# Altium PCB STRWL-P01-V01.PcbDoc
Units mil, origin at the board's own origin, x right, y up, seen from the top; angles counter-clockwise.
Board outline 2615 x 3075 mil, 2 copper layers (Top Layer, Bottom Layer); 102 components, 62 nets, 400 pads, 108 vias.
Unrouted connection lines stored in the file: 27.
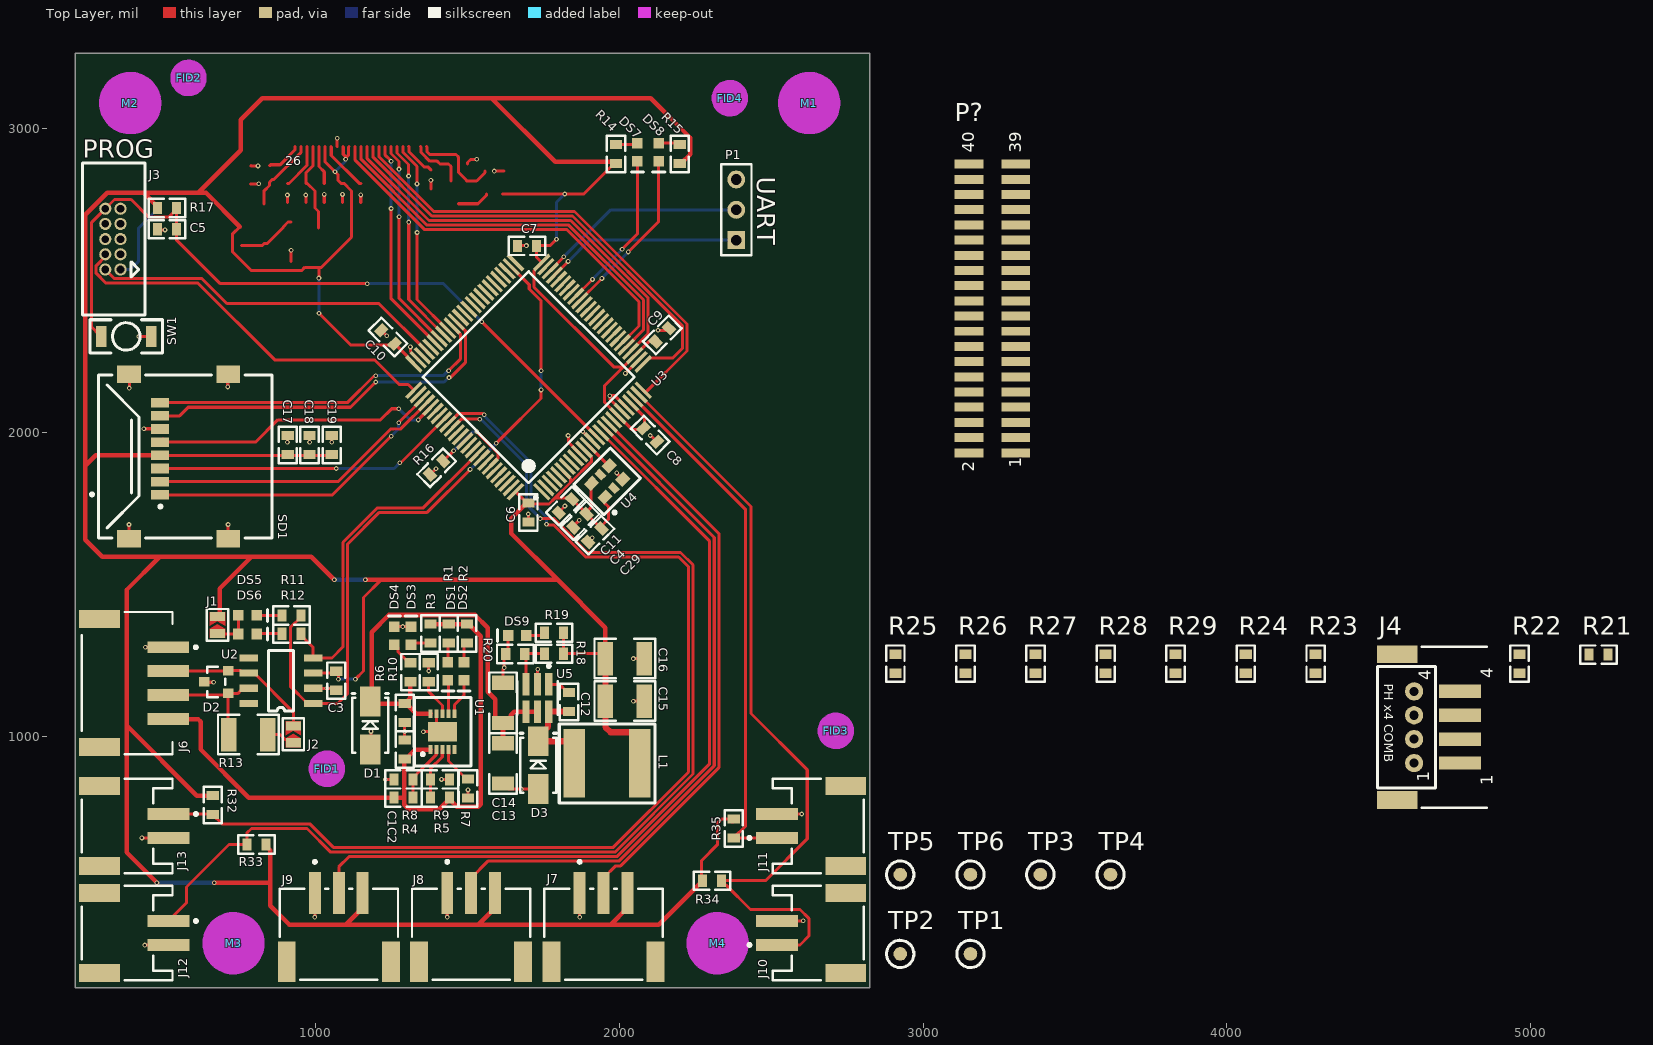
[diagram p0: Top Layer view]
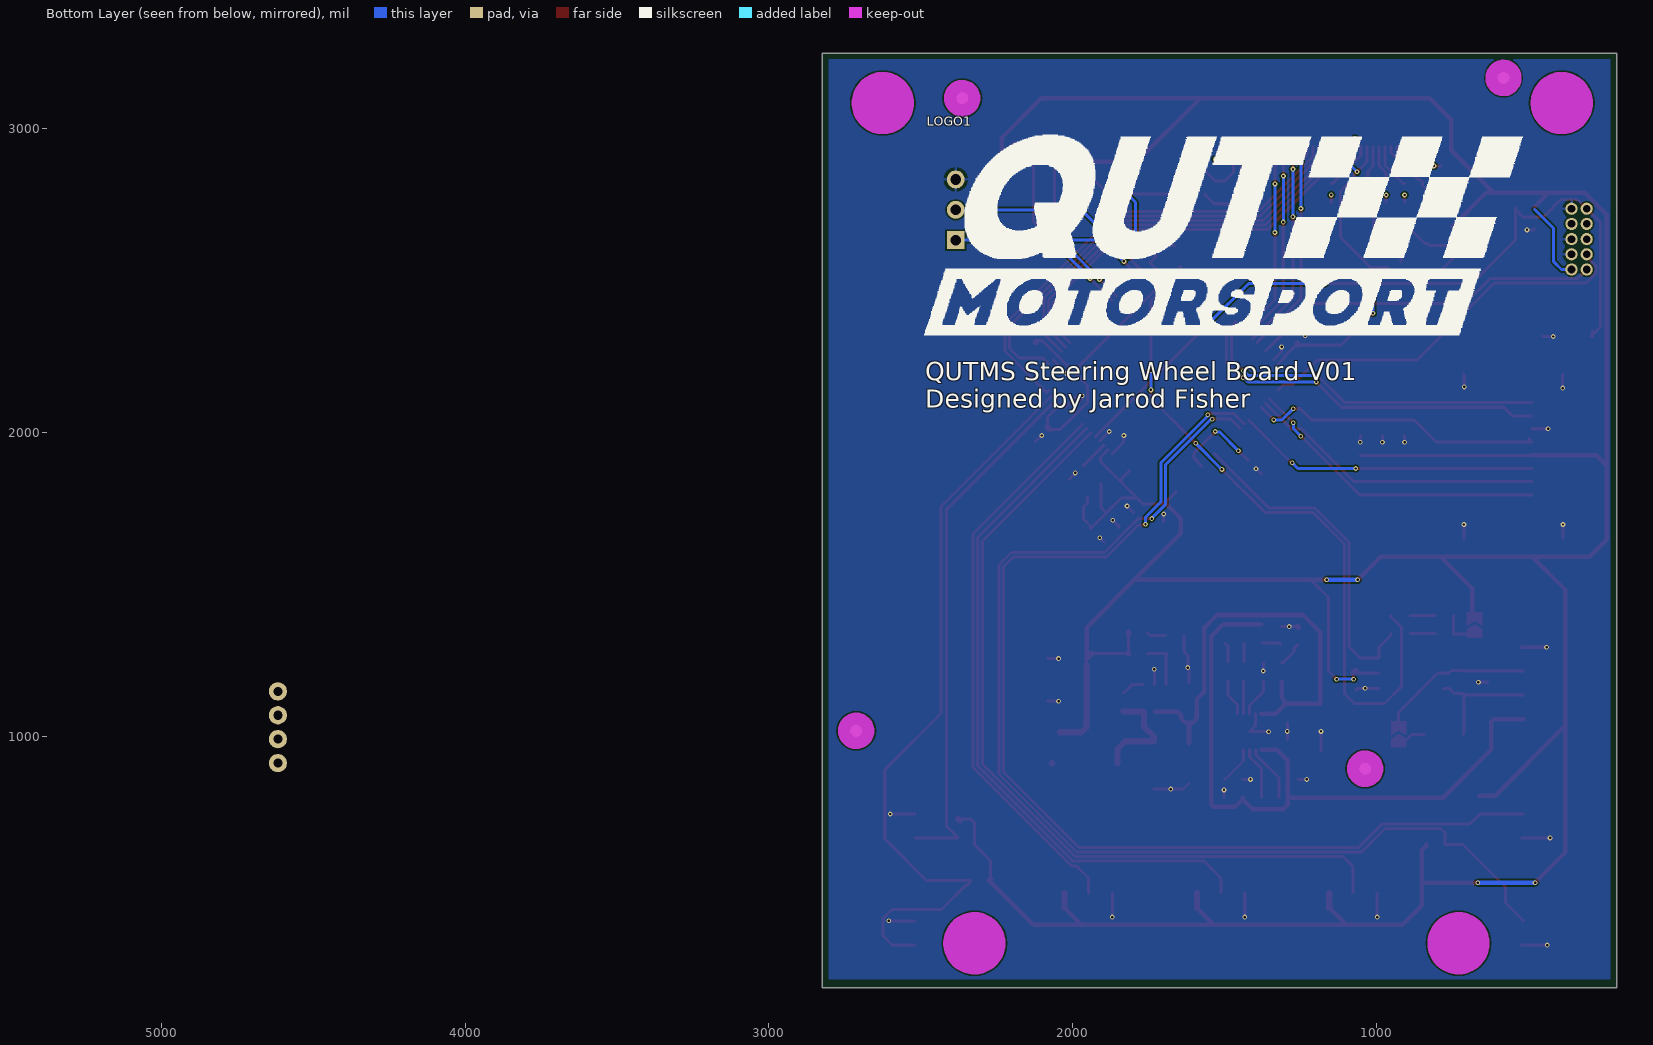
[diagram p1: Bottom Layer view, seen from below]

## Layer stack, top to bottom
Top Solder: solder mask 0.4, Solder Resist, Dk 3.5
Top Layer: signal copper 1.4
Dielectric 1: dielectric 12.6, FR-4, Dk 4.8
Bottom Layer: signal copper 1.4
Bottom Solder: solder mask 0.4, Solder Resist, Dk 3.5

## Board outline
210,173 2825,173 2825,3248 210,3248

## Design rules (kind name [scope] priority, off if disabled: settings)
Clearance [All] p1: gap=5 ignorepadtopadclearanceinfootprint=TRUE
PolygonConnect [All] p1: thpad.connectstyle=Relief thpad.reliefconductorwidth=10 thpad.reliefentries=4 thpad.polygonreliefangle="90 Angle" thpad.airgapwidth=10 smdpad.connectstyle=Relief smdpad.reliefconductorwidth=10 smdpad.reliefentries=4 smdpad.polygonreliefangle="90 Angle" smdpad.airgapwidth=10 via.connectstyle=Direct via.reliefconductorwidth=10 via.reliefentries=4 via.polygonreliefangle="90 Angle" via.airgapwidth=10
RoomDefinition U_STRWL-S06-V00-Peripherals [InComponentClass('U_STRWL-S06-V00-Peripherals')] p1: confinementstyle=ConfineIn formatcopy=TRUE lockcomponents=FALSE outline 2870,751 5325,751 5325,1409 2870,1409
RoomDefinition U_STRWL-S05-V00-Master-PSU3V3-300mA [InComponentClass('U_STRWL-S05-V00-Master-PSU3V3-300mA')] p2: confinementstyle=ConfineIn formatcopy=TRUE lockcomponents=FALSE outline 0,0 2000,0 2000,1000 0,1000
RoomDefinition U_STRWL-S04-V00-Microcontroller [InComponentClass('U_STRWL-S04-V00-Microcontroller')] p3: confinementstyle=ConfineIn formatcopy=TRUE lockcomponents=FALSE outline 0,0 2000,0 2000,1000 0,1000
RoomDefinition U_STRWL-S03-V00-CAN_MAIN [InComponentClass('U_STRWL-S03-V00-CAN_MAIN')] p4: confinementstyle=ConfineIn formatcopy=TRUE lockcomponents=FALSE outline 2870,490 3753,490 3753,701 2870,701
RoomDefinition U_STRWL-S02-V00-12VProtection [InComponentClass('U_STRWL-S02-V00-12VProtection')] p5: confinementstyle=ConfineIn formatcopy=TRUE lockcomponents=FALSE outline 2870,229 3272,229 3272,440 2870,440
RoomDefinition STRWL-S01-V01-Master1 [InComponentClass('STRWL-S01-V01-Master1')] p6: confinementstyle=ConfineIn formatcopy=TRUE lockcomponents=FALSE outline 0,0 2000,0 2000,1000 0,1000
RoutingVias [All] p1: holewidth=7.87 width=15.75 viastyle="Through Hole" minholewidth=7.87 minwidth=15.75 maxholewidth=7.87 maxwidth=15.75
SilkToSilkClearance [All] p1: silktosilkclearance=1
SolderMaskExpansion SolderMaskExpansion_Via [IsVia] p1: expansion=4 istentingtop=TRUE
SolderMaskExpansion [All] p2: expansion=4 istentingtop=FALSE
Width [All] p1: maxlimit=20 minlimit=5 preferedwidth=10
29 further rules are at their usual default settings.

## Classes and differential pairs
component class U_STRWL-S06-V00-Peripherals: C17 C18 C19 J4 R21 R22 R23 R24 R25 R26 R27 R28 R29 SD1
component class U_STRWL-S05-V00-Master-PSU3V3-300mA: C12 C13 C14 C15 C16 D3 DS9 L1 R18 R19 R20 U5
component class U_STRWL-S04-V00-Microcontroller: C4 C5 C6 C7 C8 C9 C10 C11 C29 DS7 DS8 J3 P1 R14 R15 R16 R17 SW1 U3 U4
component class U_STRWL-S03-V00-CAN_MAIN: C3 D2 DS5 DS6 J1 J2 R11 R12 R13 TP3 TP4 TP5 TP6 U2
component class U_STRWL-S02-V00-12VProtection: 2 C1 C2 D1 DS1 DS2 DS3 DS4 R1 R2 R3 R4 R5 R6 R7 R8 R9 R10 TP1 TP2 U1
component class STRWL-S01-V01-Master1: FID1 FID2 FID3 FID4 J6 J7 J8 J9 J10 J11 J12 J13 LOGO1 M1 M2 M3 M4 P? R32 R33 R34 R35

## Components (designator, comment, footprint, x,y, rotation, side; value= is the part's Value field where it differs from the comment)
C1 "4u7 50V 5%" Cap_Ceramic_0603 1294.24,1076.23 r90 top
C2 "470nF 50V 5%" Cap_Ceramic_0603 1294.24,956.23 r270 top
C3 "100nF 50V 5% X7R 0603" Cap_Ceramic_0603 1069,1183 r270 top
C4 "100nF 50V 5% X7R 0603" Cap_Ceramic_0603 1871,1709.74 r45 top
C5 "100nF 50V 5% X7R 0603" Cap_Ceramic_0603 511.61,2668.74 r0 top
C6 "100nF 50V 5% X7R 0603" Cap_Ceramic_0603 1701.3,1736.97 r90 top
C7 "100nF 50V 5% X7R 0603" Cap_Ceramic_0603 1697,2614 r0 top
C8 "100nF 50V 5% X7R 0603" Cap_Ceramic_0603 2102.38,1991.49 r135 top
C9 "100nF 50V 5% X7R 0603" Cap_Ceramic_0603 2142,2321 r225 top
C10 "100nF 50V 5% X7R 0603" Cap_Ceramic_0603 1239,2314 r315 top
C11 "4u7" Cap_Ceramic_0603 1823.08,1757.98 r45 top
C12 "100nF 50V 5% X7R 0603" Cap_Ceramic_0603 1834.83,1112.69 r270 top
C13 "22uF 35V" Cap_Ceramic_1206 1617.83,910.69 r270 top
C14 "22uF 35V" Cap_Ceramic_1206 1617.83,1110.16 r90 top
C15 "47uF 16V 1210" Cap_Ceramic_1210 2018.83,1115.69 r180 top
C16 "47uF 16V 1210" Cap_Ceramic_1210 2018.83,1255.69 r180 top
C17 "4u7" Cap_Ceramic_0603 909.44,1958.82 r270 top
C18 "1uF" Cap_Ceramic_0603 981.2,1958.82 r270 top
C19 "100nF 50V 5% X7R 0603" Cap_Ceramic_0603 1054.07,1958.82 r270 top
C29 "100nF 50V 5% X7R 0603" Cap_Ceramic_0603 1920.03,1661.92 r45 top
D1 "1N4448WQ-7-F" SMA 1181.24,1036 r90 top
D2 "NUP2105L" NUP2105L 674,1179 r90 top
D3 "B260A-13-F" SMA 1733.83,905.16 r90 top
DS1 "LED Red 0603" "LED RED 0603" 1436.3,1214 r270 top
DS2 "LED Red 0603" "LED RED 0603" 1489.24,1214 r270 top
DS3 "LED Green 0603" "LED GREEN 0603" 1315.24,1331 r90 top
DS4 "LED Green 0603" "LED GREEN 0603" 1260.24,1331 r90 top
DS5 "LED Blue 0603" "LED BLUE 0603" 777.12,1397.86 r0 top
DS6 "LED Blue 0603" "LED BLUE 0603" 777.12,1336.62 r0 top
DS7 "LED Orange" "LED ORANGE 0603" 2060.15,2922.03 r270 top
DS8 "LED Orange" "LED ORANGE 0603" 2130.2,2922.03 r270 top
DS9 "LED Green 0603" "LED GREEN 0603" 1664.59,1331.92 r180 top
FID1 "Fiducial 1MM" "FIDUCIAL 1MM" 1038.18,893.24 r0 top
FID2 "Fiducial 1MM" "FIDUCIAL 1MM" 582.87,3166.62 r90 top
FID3 "Fiducial 1MM" "FIDUCIAL 1MM" 2713,1018 r90 top
FID4 "Fiducial 1MM" "FIDUCIAL 1MM" 2364,3100 r90 top
J1 "Jumper 2Way Solderable" Jumper_2Way_Solderable 678,1339 r0 top
J2 "Jumper 2Way Solderable" Jumper_2Way_Solderable 928,979 r0 top
J3 "IDC 10P 2x5 1.27mm" "IDC 1.27MM 10P" 334,2636.24 r90 top
J4 "JST PH 4x RIGHT COMB" "JST PH 4x RIGHT COMB" 4501,1030 r90 top
J6 "JST PH 4 Way SMD Header" "JST 4P SMD" 380.52,1175.04 r90 top
J7 "JST PH 3 Way SMD Header" "JST 3P SMD" 1948.73,348.98 r0 top
J8 "JST PH 3 Way SMD Header" "JST 3P SMD" 1513.06,348.98 r0 top
J9 "JST PH 3 Way SMD Header" "JST 3P SMD" 1077.39,348.98 r0 top
J10 "JST PH 2 Way SMD Header" "JST 2P SMD" 2655,352.98 r90 top
J11 "JST PH 2 Way SMD Header" "JST 2P SMD" 2655,705 r90 top
J12 "JST PH 2 Way SMD Header" "JST 2P SMD" 380.58,352.98 r270 top
J13 "JST PH 2 Way SMD Header" "JST 2P SMD" 380.58,705 r270 top
L1 "74404064221" Inductor_6x6mm 1957.83,911.16 r0 top
LOGO1 "50mm Wide QUTMS Logo" "QUTMS LOGO 50MM" 2490,2320 r180 bottom
M1 "Hole M3 Tight Unplated" "M3.2 UNPLATED" 2625.36,3083.86 r0 top
M2 "Hole M3 Tight Unplated" "M3.2 UNPLATED" 391.2,3083.86 r0 top
M3 "Hole M3 Tight Unplated" "M3.2 UNPLATED" 731,319 r0 top
M4 "Hole M3 Tight Unplated" "M3.2 UNPLATED" 2324,319 r0 top
P1 "Header 3" HDR1X3 2385.36,2632.57 r90 top
P? "62104021021" 62104021021 3228,2408 r90 top
R1 "4k7 5% 0603" Res_ThinFilm_0603 1439.38,1337.99 r90 top
R2 "4k7 5% 0603" Res_ThinFilm_0603 1499.64,1337.99 r90 top
R3 "4k7 5% 0603" Res_ThinFilm_0603 1379.24,1338 r90 top
R4 "2M2 1%" Res_ThinFilm_0603 1290.38,798.24 r180 top
R5 "2M2 1%" Res_ThinFilm_0603 1410.04,798.24 r0 top
R6 "4k7 5% 0603" Res_ThinFilm_0603 1313.24,1211 r270 top
R7 "150k 5% 0603" Res_ThinFilm_0603 1502.64,828.24 r90 top
R8 "390k 5%" Res_ThinFilm_0603 1290.38,858.24 r0 top
R9 "240k 5%" Res_ThinFilm_0603 1410.04,858.24 r180 top
R10 "1k 5% 0603" Res_ThinFilm_0603 1373.24,1211 r270 top
R11 "330R" Res_ThinFilm_0603 921.5,1397.86 r180 top
R12 "330R" Res_ThinFilm_0603 921.53,1337.81 r180 top
R13 "120R 1% 1210" Res_ThinFilm_1210 780,1006 r0 top
R14 "330R" Res_ThinFilm_0603 1989.48,2916.62 r270 top
R15 "330R" Res_ThinFilm_0603 2199.63,2916.62 r270 top
R16 "10k 1% 0603" Res_ThinFilm_0603 1399.1,1883.85 r225 top
R17 "4k7" Res_ThinFilm_0603 511.61,2738.6 r180 top
R18 "64k9 1%" Res_ThinFilm_0603 1786.06,1271.92 r0 top
R19 "1k" Res_ThinFilm_0603 1785.7,1340.92 r0 top
R20 "19k6 1%" Res_ThinFilm_0603 1658.06,1270.92 r0 top
R21 "10k 5% 0603" Res_ThinFilm_0603 5223,1269 r0 top
R22 "15k 5% 0603" Res_ThinFilm_0603 4963,1239 r90 top
R23 "22R" Res_ThinFilm_0603 4292,1239 r90 top
R24 "22R" Res_ThinFilm_0603 4062,1239 r90 top
R25 "10k 5% 0603" Res_ThinFilm_0603 2909,1239 r90 top
R26 "10k 5% 0603" Res_ThinFilm_0603 3140,1239 r90 top
R27 "10k 5% 0603" Res_ThinFilm_0603 3370,1239 r90 top
R28 "10k 5% 0603" Res_ThinFilm_0603 3601,1239 r90 top
R29 "10k 5% 0603" Res_ThinFilm_0603 3831,1239 r90 top
R32 "10k 5% 0603" Res_ThinFilm_0603 662.8,773.53 r270 top
R33 "10k 5% 0603" Res_ThinFilm_0603 806.24,644 r180 top
R34 "10k 5% 0603" Res_ThinFilm_0603 2306,525 r180 top
R35 "10k 5% 0603" Res_ThinFilm_0603 2377.27,697.1 r90 top
SD1 "47219-2001" 47219-2001 550.25,1921 r90 top
SW1 "B3U-1000P" "BTN B3U-1000P" 378,2315.85 r180 top
TP1 "TestPoint" TestPointSMD 3156,284 r0 top
TP2 "TestPoint" TestPointSMD 2925,284 r0 top
TP3 "TestPoint_SMD" TestPointSMD 3386,545 r0 top
TP4 "TestPoint_SMD" TestPointSMD 3617,545 r0 top
TP5 "TestPoint_SMD" TestPointSMD 2925,545 r0 top
TP6 "TestPoint_SMD" TestPointSMD 3156,545 r0 top
U1 "MAX17612A" MAX17612A 1418.7,1015.23 r90 top
U2 "SN65HVD233" SN65HVD233DR 887,1183 r180 top
U3 "STM32F207VGT7" STM-LQFP100_N 1702,2182 r135 top
U4 "DSC1101CI5-020.0000T" VDFN6_3P2X2P5_MCH 1960.45,1839.08 r135 top
U5 "LMR14010ADDCR" Texas_Instruments_DDC0006A_IPC_A 1731.06,1125.92 r270 top

## Footprints (in the part's own frame and the unit in brackets; to place one, negate y for a bottom-side part, rotate by r counter-clockwise, add the part's x,y. Pads: shape width x height; smd on the part's side, far side on the other; paste and mask are expansions set on the pad)
47219-2001 [mm]
  rect 0.8x1.5 smd: 1(-3.205,1.55) 2(-2.105,1.55) 3(-1.005,1.55) 4(0.095,1.55) 5(1.195,1.55) 6(2.295,1.55) 7(3.395,1.55) 8(4.495,1.55)
  rect 1.45x2 smd: 9(6.875,4.15) 10(6.875,-4.15) 11(-6.875,-4.15) 12(-6.875,4.15)
  silkscreen extent -6.8,-7.8 6.8,7.36, body extent -7.3,-7.79 7.3,6.71, height 1.91
62104021021 [mm] "Pin Header, pitch 1.27 mm, SMD, Vertical, dual row, 40p"
  rect 0.75x2.4 smd: 1(-12.065,-1.95) 2(-12.065,1.95) 3(-10.795,-1.95) 4(-10.795,1.95) 5(-9.525,-1.95) 6(-9.525,1.95) 7(-8.255,-1.95) 8(-8.255,1.95) 9(-6.985,-1.95) 10(-6.985,1.95) 11(-5.715,-1.95) 12(-5.715,1.95) 13(-4.445,-1.95) 14(-4.445,1.95) 15(-3.175,-1.95) 16(-3.175,1.95) 17(-1.905,-1.95) 18(-1.905,1.95) 19(-0.635,-1.95) 20(-0.635,1.95) 21(0.635,-1.95) 22(0.635,1.95) 23(1.905,-1.95) 24(1.905,1.95) 25(3.175,-1.95) 26(3.175,1.95) 27(4.445,-1.95) 28(4.445,1.95) 29(5.715,-1.95) 30(5.715,1.95) 31(6.985,-1.95) 32(6.985,1.95) 33(8.255,-1.95) 34(8.255,1.95) 35(9.525,-1.95) 36(9.525,1.95) 37(10.795,-1.95) 38(10.795,1.95) 39(12.065,-1.95) 40(12.065,1.95)
  body extent -12.7,-2.5 12.7,2.5, height 5.9
"BTN B3U-1000P" [mil] "OMRON B3U-1000P"
  rect 35x70 smd: 1(-82.68,0) 2(82.68,0)
  silkscreen extent -120,-55 120,55, body extent -79,-49 79,49, height 63
Cap_Ceramic_0603 [mil]
  rect 30x40 smd: 1(-31.24,0) 2(31.24,0)
  silkscreen extent -60,-30 60,30, body extent -31,-16 32,16, height 33
Cap_Ceramic_1206 [mil]
  rect 47x71 smd: 1(-66.08,0) 2(66.08,0)
  silkscreen extent -100,-45 100,45, body extent -63,-31 63,32, height 53
Cap_Ceramic_1210 [mm]
  rect 1.3x2.8 smd: 1(-1.625,0) 2(1.625,0)
  silkscreen extent -2.54,-1.65 2.54,1.65, body extent -1.6,-1.25 1.6,1.25, height 1.35
"FIDUCIAL 1MM" [mm]
  round 1 smd mask+1: 1(0,0)
  round 1 smd far side mask+1: 1(0,0)
  Keep-Out Layer circle w1.524: c0,0 r0.762
HDR1X3 [mm] "Connector; Header; 3 Position"
  rect 1.5x1.5 hole 0.9: 1(0,0)
  round 1.5 hole 0.9: 2(2.54,0) 3(5.08,0)
  silkscreen extent -1.27,-1.27 6.35,1.27
"IDC 1.27MM 10P" [mil]
  round 40 hole 25: 1(-100,-25) 2(-100,25) 3(-50,-25) 4(-50,25) 5(0,-25) 6(0,25) 7(50,-25) 8(50,25) 9(100,-25) 10(100,25)
  silkscreen extent -250,-105 250,100, body extent -249,-104 249,100, height 214
Inductor_6x6mm [mm]
  rect 1.8x5.7 smd: 1(-2.667,0) 2(2.794,0)
  silkscreen extent -3.94,-3.3 4.06,3.3, body extent -3,-3 3,3, height 4.56
"JST 2P SMD" [mm] "SMD, 2-Leads, Body 7.9x7.6mm, Pitch 2mm"
  rect 1x3.5 smd: 1(-1,3.45) 2(1,3.45)
  rect 1.5x3.4 smd: MP1(-3.35,-2.3) MP2(3.35,-2.3)
  silkscreen extent -3.95,-3.8 3.95,5.87, body extent -3.95,-3.8 3.95,4.8, height 5.6
"JST 3P SMD" [mm]
  rect 1x3.5 smd paste+0 mask+0: 1(-2,3.45) 2(0,3.45) 3(2,3.45)
  rect 1.5x3.4 smd paste+0 mask+0: 4(4.35,-2.3) 5(-4.35,-2.3)
  silkscreen extent -4.95,-3.8 4.95,6.17, body extent -5.2,-4.1 5.2,5.3, height 0.25
"JST 4P SMD" [mm]
  rect 1x3.5 smd paste+0 mask+0: 1(3,-3.45) 2(1,-3.45) 3(-1,-3.45) 4(-3,-3.45)
  rect 1.5x3.4 smd paste+0 mask+0: 5(-5.35,2.3) 6(5.35,2.3)
  silkscreen extent -5.95,-5.88 5.95,3.8, body extent -6.2,-5.3 6.2,4.1, height 0.25
"JST PH 4x RIGHT COMB" [mm]
  round 1.524 hole 0.762: 1(-3,-2.921) 2(-1,-2.921) 3(1,-2.921) 4(3,-2.921)
  rect 1.1x3.5 smd: 1(-3,-6.75) 2(-1,-6.75) 3(1,-6.75) 4(3,-6.75)
  rect 1.5x3.4 smd: M(-6.1,-1.5) M(6.1,-1.5)
  silkscreen extent -6.73,-9.02 6.73,0.13, body extent -6.07,-8.2 6.07,0.06, height 5.89
Jumper_2Way_Solderable [mil]
  rect 50x30 smd: 1(0,55) 2(0,0)
  Top Layer region: -25,25 0,40 25,25 25,70 -25,70
  Top Layer region: -25,15 0,30 25,15 25,-15 0,-15 -25,-15
  silkscreen extent -35,-25 35,80
"LED BLUE 0603" [mil]
  rect 35x35 smd: 1(-30,0) 2(30,0)
  silkscreen extent 65,-20 65,20, body extent -40,-20 40,20, height 30
"LED GREEN 0603" [mil]
  rect 35x35 smd: 1(-30,0) 2(30,0)
  silkscreen extent 65,-20 65,20, body extent -40,-20 40,20, height 30
"LED ORANGE 0603" [mil]
  rect 35x35 smd: 1(-30,0) 2(30,0)
  silkscreen extent 65,-20 65,20, body extent -40,-20 40,20, height 30
"LED RED 0603" [mil]
  rect 35x35 smd: 1(-30,0) 2(30,0)
  silkscreen extent 65,-20 65,20, body extent -40,-20 40,20, height 30
"M3.2 UNPLATED" [mm]
  round 0 hole 3.2 unplated mask+2.6: 1(0,0)
  Keep-Out Layer circle w2.667: c0,0 r1.27
MAX17612A [mm]
  rect 0.75x0.3 smd: 1(-1.5,1) 2(-1.5,0.5) 3(-1.5,0) 4(-1.5,-0.5) 5(-1.5,-1) 6(1.5,-1) 7(1.5,-0.5) 8(1.5,0) 9(1.5,0.5) 10(1.5,1)
  rect 1.6x2.4 smd: 11(0,0)
  silkscreen extent -2.87,-2.4 2.87,2.35, body extent -1.55,-1.5 1.55,1.5, height 0.8
NUP2105L [mm]
  rect 0.8x0.9 smd: 1(-0.95,-1) 2(0.95,-1) 3(0,1)
  silkscreen extent -1.27,-0.76 1.27,0.76, body extent -1.45,-1.22 1.45,1.18, height 1
"QUTMS LOGO 50MM" [mil]
  silkscreen extent 0,0 1970,660
Res_ThinFilm_0603 [mil]
  rect 30x40 smd: 1(-31.24,0) 2(31.24,0)
  silkscreen extent -60,-30 60,30, body extent -31,-16 32,16, height 18
Res_ThinFilm_1210 [mm]
  rect 1.3x2.8 smd: 1(-1.625,0) 2(1.625,0)
  silkscreen extent -2.54,-1.65 2.54,1.65, body extent -1.6,-1.25 1.6,1.25, height 0.6
SMA [mm]
  rect 2.5x1.7 smd: A(-2,0) K(2,0)
  silkscreen extent -2.3,-1.52 2.67,1.52, body extent -2.52,-1.46 2.52,1.46, height 2.4
SN65HVD233DR [mm]
  rect 1.55x0.6 smd: 1(-2.7,1.903) 2(-2.7,0.633) 3(-2.7,-0.637) 4(-2.7,-1.907) 5(2.7,-1.907) 6(2.7,-0.637) 7(2.7,0.633) 8(2.7,1.903)
  silkscreen extent -1.04,-2.54 1.04,2.54, body extent -3.01,-2.45 3.01,2.45, height 1.63
STM-LQFP100_N [mm] "Thin QFP, 100-Leads, Body 14x14mm, Pitch 0.5mm, IPC Medium Density"
  rect 1.8x0.3 smd: 1(-7.55,6) 2(-7.55,5.5) 3(-7.55,5) 4(-7.55,4.5) 5(-7.55,4) 6(-7.55,3.5) 7(-7.55,3) 8(-7.55,2.5) 9(-7.55,2) 10(-7.55,1.5) 11(-7.55,1) 12(-7.55,0.5) 13(-7.55,0) 14(-7.55,-0.5) 15(-7.55,-1) 16(-7.55,-1.5) 17(-7.55,-2) 18(-7.55,-2.5) 19(-7.55,-3) 20(-7.55,-3.5) 21(-7.55,-4) 22(-7.55,-4.5) 23(-7.55,-5) 24(-7.55,-5.5) 25(-7.55,-6) 51(7.55,-6) 52(7.55,-5.5) 53(7.55,-5) 54(7.55,-4.5) 55(7.55,-4) 56(7.55,-3.5) 57(7.55,-3) 58(7.55,-2.5) 59(7.55,-2) 60(7.55,-1.5) 61(7.55,-1) 62(7.55,-0.5) 63(7.55,0) 64(7.55,0.5) 65(7.55,1) 66(7.55,1.5) 67(7.55,2) 68(7.55,2.5) 69(7.55,3) 70(7.55,3.5) 71(7.55,4) 72(7.55,4.5) 73(7.55,5) 74(7.55,5.5) 75(7.55,6)
  rect 0.3x1.8 smd: 26(-6,-7.55) 27(-5.5,-7.55) 28(-5,-7.55) 29(-4.5,-7.55) 30(-4,-7.55) 31(-3.5,-7.55) 32(-3,-7.55) 33(-2.5,-7.55) 34(-2,-7.55) 35(-1.5,-7.55) 36(-1,-7.55) 37(-0.5,-7.55) 38(0,-7.55) 39(0.5,-7.55) 40(1,-7.55) 41(1.5,-7.55) 42(2,-7.55) 43(2.5,-7.55) 44(3,-7.55) 45(3.5,-7.55) 46(4,-7.55) 47(4.5,-7.55) 48(5,-7.55) 49(5.5,-7.55) 50(6,-7.55) 76(6,7.55) 77(5.5,7.55) 78(5,7.55) 79(4.5,7.55) 80(4,7.55) 81(3.5,7.55) 82(3,7.55) 83(2.5,7.55) 84(2,7.55) 85(1.5,7.55) 86(1,7.55) 87(0.5,7.55) 88(0,7.55) 89(-0.5,7.55) 90(-1,7.55) 91(-1.5,7.55) 92(-2,7.55) 93(-2.5,7.55) 94(-3,7.55) 95(-3.5,7.55) 96(-4,7.55) 97(-4.5,7.55) 98(-5,7.55) 99(-5.5,7.55) 100(-6,7.55)
  silkscreen extent -7.67,-6.25 6.25,6.82, body extent -7,-7 7,7, height 1.6
TestPointSMD [mil]
  round 45 smd: 1(0,0)
  silkscreen extent -45,-45 45,45
Texas_Instruments_DDC0006A_IPC_A [mm]
  rect 1.854x0.612 smd paste+0 mask+0: 1(-1.15,0.95) 2(-1.15,0) 3(-1.15,-0.95) 4(1.15,-0.95) 5(1.15,0) 6(1.15,0.95)
  silkscreen extent -2.8,-1.7 1.4,1.7, body extent -2.58,-1.95 2.58,1.95, height 0.25
VDFN6_3P2X2P5_MCH [mm]
  rect 0.85x1 smd paste-0.425 mask+0: 1(-0.8,1.05) 3(-0.8,-1.05) 4(0.8,-1.05) 6(0.8,1.05)
  rect 0.85x0.6 smd paste+0 mask+0: 2(-0.8,0) 5(0.8,0)
  silkscreen extent -2.41,-2.16 1.78,2.16, body extent -1.25,-1.6 1.25,1.6, height 0.65

## Part data
C1 C11 C17: library part "4u7 50V 5% X7R 0603", "Capacitor, Ceramic, SMD, 4u7, 50V, 5%, X7R, 0603"
C2: library part "470nF 50V 5% X7R 0603", "Capacitor, Ceramic, SMD, 470nF, 50V, 5%, X7R, 0603"
C3 C4 C5 C6 C7 C8 C9 C10 C12 C19 C29: "Capacitor, Ceramic, SMD, 100nF, 50V, 5%, X7R, 0603"
C13 C14: library part "22uF 35V 20% X5R 1206", "22µF ±20% 35V Ceramic Capacitor X5R 1206 (3216 Metric)", ComponentLink1Description=Digikey, ComponentLink1URL=https://www.digikey.com.au/product-detail/en/tdk-corporation/C3216X5R1V226M160AC/445-8045-1-ND/2792165, ComponentLink2Description=Datasheet, ComponentLink2URL=https://product.tdk.com/info/en/catalog/datasheets/mlcc_commercial_general_en.pdf
C15 C16: library part "47uF 16V 10% X7R 1210", "Capacitor, Ceramic, SMD, 47uF, 16V, 5%, X7R, 1210"
C18: library part "1uF 25V 5% X7R 0603", "Capacitor, Ceramic, SMD, 1uF, 25V, 5%, X7R, 0603"
D1: "Diode, SMD, 75V, 5%, 250mA, SOD123", Average Rectified Current=150mA, Forward Voltage=1V, Manufacturer="ON Semiconductor / Fairchild", Manufacturer Part Number=1N914BWS, Max Forward Surge Current (Ifsm)=4A, Max Operating Temperature=150°C, Max Repetitive Reverse Voltage (Vrrm)=75V, Max Reverse Leakage Current=5uA, Min Operating Temperature=-55°C, Package Quantity=1, Power Dissipation=200mW, Category="Rectifier Diodes", Contact Plating=Tin,Matte, Element Configuration=Single, Forward Current=150mA, Height=1mm, Lead Free="Lead Free", Length=1.8mm, Max Reverse Voltage (DC)=75V, Mount="Surface Mount", Number of Pins=2, Packaging="Tape and Reel", Peak Reverse Current=5uA, Radiation Hardening=No, REACH SVHC="No SVHC", Recovery Time=4ns, Reverse Recovery Time=4ns, Reverse Voltage=75V, Weight=0.0276g, Width=1.35mm
D3: "Diode, Schottky Barrier Rectifier, 60 V, 2 A, B260A-13-F"
DS5 DS6: library part "LED BLUE 0603"
DS7 DS8: library part "LED ORANGE 0603"
J1 J2: library part "Jumper 2Way Side Solderable", "Jumper 2Way Side Solderable"
J10 J11 J12 J13: Colour=Black, Current Rating="3 A", Max Operating Temperature=105degC, Min Operating Temperature=-65degC, Package Quantity=100, PartNumber=S2B-PH-SM4-TB(LF)(SN), ComponentLink1Description="Manufacturer URL", ComponentLink1URL=http://www.jst.com/home2.html, ComponentLink2Description=Datasheet, ComponentLink2URL=http://www.jst-mfg.com/product/pdf/eng/ePH.pdf, Contact Finish=Lead, Contact Material=Bronze, Contact Plating=Tin, DatasheetVersion=Dec-12, Height="8.13 mm", Lead Pitch="0.1 inch", Length="101.19 mm", Mount="Through Hole", PackageDescription="Male Header, Pitch 2 mm, 1 x 2 Position, Height 5.5 mm", PackageReference=S2B-PH-SM4-TB(LF)(SN)-2, Packaging=Bulk, Pins=40, Radiation Hardening=No, RoHSCompliant=True, Width="2.34 mm"
L1: "FIXED IND 220UH 660MA 850 MOHM", ComponentLink1Description=Digikey, ComponentLink1URL=https://www.digikey.com.au/product-detail/en/w%C3%BCrth-elektronik/74404064221/732-7261-1-ND/5353241, ComponentLink2Description="LCSC A", ComponentLink2URL=https://lcsc.com/product-detail/Power-Inductors_Sunlord-SWPA6045S221MT_C91047.html, ComponentLink3Description="LCSC B", ComponentLink3URL=https://lcsc.com/product-detail/Power-Inductors_SXN-Shun-Xiang-Nuo-Elec-SMNR6045-221MT_C467145.html
LOGO1: library part "QUTMS Logo 50mm"
M1 M2 M3 M4: "M3.2 Hole, No Plating"
P1: "Header, 3-Pin", LatestRevisionDate=17-Jul-2002, LatestRevisionNote="Re-released for DXP Platform.", Publisher="Altium Limited"
P?: "WR-PHD Pin Header, SMT, pitch 1.27mm, Dual Row, Vertical, 40p", Contact Resistance=20mOhm, Manufacturer="Wurth Elektronik", Operating Temperature="-40 to +105degC", Rated Current=1A, Withstanding Voltage=500VAC, Working Voltage=100VAC, ComponentLink1Description=Manufacturer, ComponentLink1URL=http://www.we-online.de, ComponentLink2Description=Datasheet, ComponentLink2URL=https://www.we-online.com/catalog/datasheet/62104021021.pdf, Gender="Pin Header", Manufacturer Part Number=62104021021, Mounting Technology=SMT, Orientation=Vertical, Packaging=Tube, Pin Number=40, Pitch=1.27mm, Row Number=Dual
R1 R2 R3 R6: "Resistor, SMD, 4k7, 0.1W, 5%, 0603"
R4 R5: library part "2M2 1% 0603", "Resistor, SMD, 2M2, 0.125W, 1%, 0603"
R7: library part "150k 5%, 0603", "Resistor, SMD, 150k, 0.1W, 5%, 0603"
R8: library part "390k 5% 0603", "Resistor, SMD, 390k, 0.1W, 5%, 0603"
R9: library part "240k 5% 0603", "Resistor, SMD, 240k, 0.1W, 5%, 0603"
R10: "Resistor, SMD, 1k, 0.1W, 5%, 0603"
R11 R12 R14 R15: library part "330R 5% 0603", "Resistor, SMD, 330R, 0.1W, 5%, 0603"
R13: "Resistor, SMD, 120R, 0.25W, 1%, 1210"
R16: library part "20k 1% 0603", "Resistor, SMD, 20k, 0.1W, 5%, 0603"
R17: library part "4k7 5% 0603", "Resistor, SMD, 4k7, 0.1W, 5%, 0603"
R18: library part "64k9 1% 0603", "Resistor, SMD, 64k9, 0.1W, 5%, 0603"
R19: library part "1k 5% 0603", "Resistor, SMD, 1k, 0.1W, 5%, 0603"
R20: library part "19k6 1% 0603", "Resistor, SMD, 19k6, 0.1W, 5%, 0603"
R21 R25 R26 R27 R28 R29 R32 R33 R34 R35: "Resistor, SMD, 10k, 0.1W, 5%, 0603"
R22: "Resistor, SMD, 15k, 0.1W, 5%, 0603"
R23 R24: library part "22R 1% 0603", "Resistor, SMD, 22R, 0.1W, 1%, 0603"
SD1: "MicroSD Card Connector, Hinge Type, -40 to 85 degC, 8-Pin SMD, RoHS, Tape and Reel"
SW1: library part "BTN B3U-1000P", "Omron B3U-1000P Ultra Miniture Switch", ComponentLink1Description=LCSC, ComponentLink1URL=https://lcsc.com/product-detail/Tactile-Switches_BRIGHT-TSA063G50-250_C294565.html
U1: "4.5V to 60V, 250mA Current-Limiter with OV, UV, and Reverse Protection", ComponentLink1Description=Datasheet, ComponentLink1URL=https://datasheets.maximintegrated.com/en/ds/MAX17612A-MAX17612C.pdf
U3: library part STM32F207VGT7-Custom, "ARM Cortex-M3 32-bit MCU, 1024 KB Flash, 128 KB Internal RAM, 82 I/Os, 100-pin LQFP, -40 to 105 degC, Tray", I/Os (High Current)=82, Operating Frequency(F) (Processor speed) (MHz)=120, Supply Voltage(Vcc) min (V)=1.8, ComponentLink1Description="Manufacturer URL", ComponentLink1URL=http://www.st.com/web/en/home.html, ComponentLink2Description=Datasheet, ComponentLink2URL=http://www.st.com/st-web-ui/static/active/en/resource/technical/document/datasheet/CD00237391.pdf, ComponentLink3Description="Package Specification", ComponentLink3URL=http://www.st.com/st-web-ui/static/active/en/resource/technical/document/data_brief/DM00071938.pdf, Core="ARM Cortex-M3", D/A Converter="2x12-bit (2 Channel)", DatasheetVersion="Rev. 9", FLASH Size (Prog) (kB)=1024, Internal RAM Size (kB)=128, Mounting Technology="Surface Mount", PackageDescription="100-Pin Low Profile Quad Flat Package, 14 x 14 mm Body, 0.5 mm Pitch", PackageReference=LQFP100, PackageVersion="Rev. 1, 06/2013", Packing=Tray, PartNumber=STM32F207VGT7
U4: "No Description Available", Built_By=EMA_Jessica, Copyright="Copyright (C) 2018 Accelerated Designs. All rights reserved", Manufacturer_Part_Number=DSC1101CI5-020.0000T, RefDes=RefDes, SourceLibrary=Microchip_2019-08-23_23, Type=DEV, Vendor=Microchip
D2: ComponentLink1Description=Datasheet, ComponentLink1URL=https://www.onsemi.cn/PowerSolutions/document/NUP2105L-D.PDF, ComponentLink2Description=LCSC, ComponentLink2URL=https://lcsc.com/product-detail/TVS_ON-Semiconductor-NUP2105LT1G_C14486.html, ComponentLink3Description=Digikey, ComponentLink3URL=https://www.digikey.com.au/product-detail/en/on-semiconductor/SZNUP2105LT1G/SZNUP2105LT1GOSCT-ND/3487669
U2: ComponentLink1Description=LCSC, ComponentLink1URL=https://lcsc.com/product-detail/CAN-ICs_Texas-Instruments_SN65HVD233DRG4_Texas-Instruments-Texas-Instruments-SN65HVD233DRG4_C61643.html, ComponentLink2Description=Digikey, ComponentLink2URL=https://www.digikey.com.au/product-detail/en/texas-instruments/SN65HVD233DR/296-35967-1-ND/4134960, ComponentLink3Description=Datasheet, ComponentLink3URL=https://www.ti.com/lit/ds/symlink/sn65hvd233.pdf?ts=1588560888178, ComponentLink4Description="Ti Product Page", ComponentLink4URL=https://www.ti.com/product/SN65HVD233

## Via types
v1: diameter 15.75, hole 7.87, Top Layer to Bottom Layer, tented both sides, 108 vias

## Nets (pads, with @x,y where several pads share a name; then routed paths per layer and width w, separated by ;. In a path a pad name is that pad's centre, name@x,y a point inside that pad or via, vN(x,y) a via of type N, cw(c..) or ccw(c..) an arc to the next point about the centre after c; other vN are vias at no path point)
3V3: C3.1 C4.2 C6.2 C7.2 C8.2 C9.2 C10.2 C11.2 C15.2 C16.2 C17.2 C18.2 C19.2 C29.2 J1.1 J3.1 J7.3 J8.3 J9.3 L1.2 R14.2 R15.2 R17.2 R18.2 R19.2 R25.2 R26.2 R27.2 R28.2 R29.2 R32.1 R33.1 R34.2 R35.2 SD1.4 U2.3 U3.6 U3.11 U3.19 U3.22 U3.28 U3.50 U3.75 U3.100 U4.1 U4.6 | length 17319.6
  Top Layer w10: R17.2 R17.2@480.38,2743.6 ; SD1.4 1051.23,1924.74 C19.2 ; 752,2677.24 727,2652.24 727,2595.62 790.29,2532.33 954.6,2532.33 965.78,2543.51 1010.38,2543.51 ; U2.3 1062.83,1208.07 C3.1 ; v1(1012,2508) 1012,2541.89 1010.38,2543.51 ; v1(1012.37,2392.18) 1116.18,2288.38 1257.55,2288.38 C10.2 1303.9,2249.1 1303.9,2246.03 U3.75 ; 1032.06,2940.24 1032.06,2890.61 v1(1065,2857.67) 1074.53,2848.14 1074.53,2829.63 1084.53,2819.63 1089.53,2819.63 1094.53,2819.63 1119.53,2794.63 1119.53,2642.66 1020.38,2543.51 1010.38,2543.51 ; v1(1076,1188) C3.1@1076,1209.24 ; 1091.11,2940.24 1092.02,2939.33 1092.02,2915.34 1101.9,2905.46 1109.89,2913.45 1109.89,2939.33 1110.8,2940.24 ; v1(1099.95,2898.95) v1@1101.9,2900.9 ; v1(1132,1188) 1159,1215 1159,1457.09 1216.91,1515 ; 1616.86,2784.58 v1(1821,2784.58) 1883.69,2784.58 R14.2@1984.48,2885.38 ; U3.100 1659.73,1804.78 1696.3,1768.21 C6.2 1705.01,1764.5 1769.12,1764.5 1788.22,1783.61 ; C7.2 1728.24,2576.13 U3.50 1745.15,2557.94 1719.84,2532.62 1719.84,2477.93 1981.77,2216 2014.39,2216 ; C7.2@1729.61,2615.37 1773.24,2615.37 v1(1793.86,2636) ; U3.6 1814.75,1873.1 1840.06,1847.79 1840.06,1835.44 ; R18.2@1817.12,1272.1 R19.2@1817.12,1340.74 ; R18.2 C16.2@1939.24,1271.92 ; U3.11 1884.34,1942.7 1909.66,1917.39 1909.66,1905.04 1840.06,1835.44 ; U4.6 1906.86,1830.03 1906.86,1752.21 1893.09,1738.44 C4.2@1893.09,1732.14 ; U4.1 1951.4,1785.49 1951.4,1768.9 1965.58,1754.72 1965.58,1715.56 1942.12,1692.1 C29.2 1940.91,1684.01 C4.2 C4.2@1893.09,1732.14 ; C16.2@1954.84,1235.31 C16.2 C16.2@1954.84,1256.33 ; U3.22 2037.46,2096.42 2083.83,2050.05 C8.2@2083.83,2017.11 ; C8.2@2076.76,2010.04 2040.99,2010.04 U3.19 1951.13,2099.91 1951.13,2152.74 2014.39,2216 ; C9.2 2116.38,2302.45 2102.23,2302.45 2098.7,2298.91 2097.3,2298.91 U3.28 2014.39,2216 ; R15.2 R15.2@2204.63,2885.38 ; R34.2@2271,528.76 2271,591 2323,643 2323,714 2337.33,728.33 R35.2 ; 1788.22,1783.61 1840.06,1835.44 ; 1788.22,1783.61 1841.63,1783.61 C11.2 C4.2@1893.09,1732.14
  Top Layer w15: 241,2714.2 243,2716.2 ; v1(479,518) 379,618 379,1036 ; R17.2@480.38,2743.6 435.1,2788.87 ; SD1.4 277.74,1924.74 243,1890 ; R32.1 610.23,804.77 379,1036 ; v1(667.82,518) 852,518 ; J1.1@685,1399 685,1486 790,1591 ; 752,2677.24 640.37,2788.87 614.87,2788.87 ; R33.1 837.47,639 852,624.47 852,518 ; v1(1062.83,1514.99) 986.83,1591 790,1591 ; J9.3@1156.13,435.6 1100.53,380 ; v1(1165,1515) 1216.91,1515 1797.39,1515 ; J8.3@1591.8,435.6 1536.2,380 ; C6.2@1696.3,1768.21 1644.93,1716.84 1644.93,1667.46 1797.39,1515 ; C16.2@1954.84,1256.33 1954.84,1357.56 1797.39,1515 ; R14.2@1984.58,2890.28 1789.73,2890.28 1580.01,3100 ; J7.3@2027.47,435.6 1971.87,380 ; R15.2@2204.63,2885.38 2234.63,2915.38 2234.63,2969.07 2103.7,3100 1580.01,3100 ; R34.2@2264.76,515 2129.76,380 1971.87,380 ; 243,1890 243,2716.2 ; 243,1890 243,1647 299,1591 488.36,1591 ; 243,2716.2 315.67,2788.87 435.1,2788.87 ; 379,1036 379,1481.64 488.36,1591 ; 435.1,2788.87 614.87,2788.87 ; 488.36,1591 790,1591 ; 614.87,2788.87 754.56,2928.56 754.56,3028.44 826.12,3100 1580.01,3100 ; 852,518 852,443 915,380 1100.53,380 ; 1100.53,380 1536.2,380 ; 1536.2,380 1971.87,380
  Top Layer w20: J1.1 680,1394 J1.1@685,1399 ; C3.1 1071,1214.24 C3.1@1076,1209.24 ; J9.3@1156.13,435.6 J9.3 ; C10.2@1257.55,2288.38 C10.2 ; J8.3@1591.8,435.6 J8.3 ; C7.2 C7.2@1729.61,2615.37 ; R19.2 R19.2@1817.12,1340.74 ; R18.2@1817.12,1272.1 R18.2 ; C16.2@1939.24,1271.92 C16.2@1954.84,1256.33 ; C16.2@1954.84,1235.31 C15.2 1954.84,1030.57 1972.04,1013.36 L1.2@2042.39,1013.36 ; R14.2@1984.58,2890.28 R14.2 ; J7.3@2027.47,435.6 J7.3 ; L1.2 L1.2@2068.74,912.08 ; C8.2@2076.76,2010.04 C8.2 C8.2@2083.83,2017.11 ; C9.2 C9.2@2123.45,2295.38 ; R34.2@2271,528.76 R34.2 ; R35.2@2372.27,723.33 R35.2
  Bottom Layer w10: J3.1 392,2536.24 417.7,2561.93 417.7,2670.91 480.38,2733.6 ; v1(1012,2508) 1012.37,2507.63 v1(1012.37,2392.18) ; v1(1065,2857.67) 1098.85,2891.52 1098.85,2897.85 v1(1099.95,2898.95) ; v1(1076,1188) v1(1132,1188) ; v1(1793.86,2636) 1793.86,2757.45 v1(1821,2784.58)
  Bottom Layer w15: v1(479,518) v1(667.82,518) ; v1(1062.83,1514.99) v1(1165,1515)
12V: C2.2 J6.4 R1.2 R2.2 R3.2 R4.2 R5.2 U1.1 | length 2212.5
  Top Layer w15: J6.4 614.21,1056.93 623,1048.15 623,956.77 781.53,798.24 R4.2 1292.24,798.24 ; R3.2 R1.2 R2.2 1504.64,1369.23 1545,1328.87 1545,1215.45 1544.83,1215.27 1544.83,1137.21 1545,1137.04 1545,777.02 1536.21,768.24 1466.28,768.24 R5.2@1441.28,793.24 ; U1.1 1328.9,956.17 1306.74,934.01 1306.74,932.49 1299.24,924.99 C2.2 1294.24,919.49 1292.24,917.49 1292.24,798.24 ; R5.2 R5.2@1441.28,793.24 ; 1292.24,798.24 1292.24,774.94 1307.18,760 1408.04,760 R5.2@1441.28,793.24
12VP: C1.2 C13.1 C14.1 D1.K R6.2 TP1.1 U1.10 U5.4 U5.5 | length 1487.3
  Top Layer w15: R6.2 1313.24,1126.47 1304.24,1117.47 1304.24,1112.47 C1.2@1299.24,1107.47 ; U1.10 1332.42,1074.28 C1.2@1299.24,1107.47 ; C13.1 C14.1 ; U5.5 U5.4 1655.04,1080.64 1643.33,1068.92 1643.33,1057.58 1629.83,1044.08 C14.1 ; C1.2@1299.24,1107.47 C1.2 1185.51,1107.47 1185.51,1342.49 1242.26,1399.24 1525.85,1399.24 1567.5,1357.58 1567.5,1206.13 1567.33,1205.95 1567.33,1146.53 1592.33,1121.53 1592.33,1057.58 1605.83,1044.08 C14.1
B1: J13.1 R32.2 U3.84 | length 3642.1
  Top Layer w10: J13.1 660.72,744.37 R32.2 693.09,712 982,712 1059.39,634.61 1980.61,634.61 2228,882 2228,1558 2195.92,1590.08 1889.92,1590.08 1784.88,1695.13 1765.43,1695.13 1762.56,1698 v1(1761,1698) ; U3.84 1470.26,2061.62 1552.66,2061.62 v1(1555.86,2058.41)
  Bottom Layer w10: v1(1555.86,2058.41) 1554.61,2057.16 1554.61,2055.61 1709.66,1900.56 1709.66,1772.34 1761,1721 v1(1761,1698)
B2: J12.1 R33.2 U3.85 | length 3815.5
  Top Layer w10: J12.1 576.42,452.36 576.42,504.41 716.01,644 R33.2 775,682 790,697 973,697 1051,619 1986.21,619 2243,875.79 2243,1564.21 2202.13,1605.08 1896.13,1605.08 1814.17,1687.05 1814.17,1687.36 1785.06,1716.47 1740.47,1716.47 v1(1740.36,1716.36) ; U3.85 1480.23,2043.74 v1(1541.19,2043.74)
  Bottom Layer w10: v1(1541.19,2043.74) 1542.45,2045 1544,2045 1694.66,1894.34 1694.66,1763.34 1740.36,1717.64 v1(1740.36,1716.36)
B3: J10.1 R34.1 U3.24 | length 2546.6
  Top Layer w10: U3.24 2434,1756.23 2434,1074.86 2619,889.86 2619,662.73 2481.27,525 R34.1 2337.24,520 2347.24,510 2352.24,510 2432.24,430 2595,430 2624,401 2624,342.61 2595,313.61 J10.1
B4: J11.1 R35.1 U3.23 | length 1754.6
  Top Layer w10: U3.23 2416.41,1745.98 2416.41,705 R35.1 2518.94,665.86 J11.1
BOOT: R16.1 U3.94 | length 300.6
  Top Layer w10: R16.1@1423.75,1908.38 v1(1455.35,1939.97) ; v1(1531.18,2003) 1531.18,2002.29 1600.64,1932.82 1600.64,1914.89 1575.33,1889.58 U3.94
  Bottom Layer w10: v1(1455.35,1939.97) 1517.28,2001.9 1530.08,2001.9 v1(1531.18,2003)
BUSY_N: U3.26 | length 1508.3
  Top Layer w10: 1189.54,2940.24 1190.44,2939.33 1190.44,2905.17 1383.42,2712.2 1846.72,2712.2 2208,2350.92 2208,2276 2176.86,2244.86 2102.54,2244.86 2101.38,2246.03 2100.1,2246.03 U3.26
"CAN GLV RX": R12.1 TP4.1 U2.4 U3.91 | length 1116.7
  Top Layer w10: R12.1 952.76,1332.81 993.28,1292.29 U2.4 1054.9,1258.07 1091.36,1294.53 1091.36,1638.58 1204.79,1752 1355.52,1752 U3.91
"CAN GLX TX": R11.1 TP6.1 U2.1 U3.52 | length 2274.4
  Top Layer w10: R11.1 952.74,1392.86 918,1358.12 918,1164.65 974.58,1108.07 U2.1 1074.45,1108.07 1106.36,1139.98 1106.36,1632.36 1211,1737 1368.36,1737 v1(1509.63,1878.27) ; v1(1595.5,1964.14) 1613.57,1982.22 1743,2111.64 v1(1743,2140) ; U3.52 1704.17,2486.05 1704.17,2472.38 1743,2433.55 v1(1743,2202.78)
  Bottom Layer w10: v1(1509.63,1878.27) v1(1595.5,1964.14) ; v1(1743,2140) v1(1743,2202.78)
"CAN MAIN H": D2.1 J6.3 R13.1 TP5.1 U2.7 | length 410.6
  Top Layer w10: J6.3 707.44,1135.67 D2.1 ; R13.1 713.37,1008.64 D2.1 ; U2.7 761.98,1158.07 755.17,1151.26 755.17,1150.68 746.09,1141.6 D2.1
"CAN MAIN L": D2.2 J2.1 J6.2 TP3.1 U2.6 | length 514.7
  Top Layer w10: J6.2 711.38,1214.41 D2.2 753.65,1216.4 761.98,1208.07 U2.6 799.38,1208.07 928,1079.45 J2.1
"CAN MAIN LED": DS5.1 DS6.1 J1.2 | length 131.3
  Top Layer w10: J1.2 680.38,1336.62 DS6.1 DS5.1
"CAN MAIN RX LED": DS6.2 R12.2 | length 83.7
  Top Layer w10: DS6.2 808.31,1337.81 R12.2
"CAN MAIN TX LED": DS5.2 R11.2 | length 83.1
  Top Layer w10: DS5.2 R11.2
CLMODE: R7.2 U1.4 | length 142.7
  Top Layer w10: 1439.3,940.14 1439.3,955.27 U1.4 1438.39,918.72 1497.64,859.47 R7.2
CS: U3.29 | length 1353.6
  Top Layer w10: 1169.85,2940.24 1170.76,2939.33 1170.76,2900.9 1374.46,2697.2 1804.23,2697.2 1840.5,2697.2 2095.3,2442.41 2095.3,2406.13 2095.3,2324.75 U3.29
DC: U3.31 | length 1329.8
  Top Layer w10: 1130.48,2940.24 1131.39,2939.33 1131.39,2896.12 1360.31,2667.2 1828.08,2667.2 2065.3,2429.98 2065.3,2350.43 U3.31
FLAG: DS2.2 U1.6 | length 122.6
  Top Layer w10: U1.6 1458.07,1103.84 1489.24,1135 DS2.2
GND: C1.1 C2.1 C3.2 C4.1 C5.1 C6.1 C7.1 C8.1 C9.1 C10.1 C11.1 C13.2 C14.2 C15.1 C16.1 C17.1 C18.1 C19.1 C29.1 D1.A D2.3 D3.A DS3.2 DS4.2 DS9.2 J3.3 J3.5 J3.9 J4.4 J6.1 J7.1 J8.1 J9.1 J10.2 J11.2 J12.2 J13.2 P1.3 R7.1 R8.1 R9.1 R10.1 R16.2 R20.1 R22.1 SD1.6 SD1.9 SD1.10 SD1.11 SD1.12 SW1.1 TP2.1 U1.9 U1.11 U2.2 U3.10 U3.13 U3.20 U3.21 U3.27 U3.74 U4.3 U5.2 | length 2632.5
  Top Layer w10: SD1.12 386.87,1696.87 v1(387,1697) ; SD1.9 388,2190.54 v1(388,2146) ; v1(419.38,2315.85) SW1.1@454.68,2315.85 ; v1(429.59,665.63) J13.2 J13.2@524.23,665.63 ; v1(436,2012.22) 488.36,2012.22 SD1.6 ; v1(439,313) 439.61,313.61 J12.2 J12.2@524.23,313.61 ; v1(440.87,1293.11) J6.1@524.17,1293.11 ; C5.1 482.68,2666.44 v1(505.38,2666.44) ; D2.3 635.64,1177.98 v1(665.5,1177.98) ; v1(712,2150) 712,2188.03 711,2189.03 SD1.10 ; v1(713,1697) 713,1650.97 SD1.11 ; v1(908.44,1968.05) 908.44,1989.04 C17.1 ; v1(981.2,1968.05) C18.1 ; U2.2 v1(1038.18,1158.07) 1062.69,1158.07 C3.2 ; v1@998,409 998.65,409.65 J9.1 ; v1(1054.07,1968.05) C19.1 ; D1.A@1183.24,952.26 v1(1183.24,1016.23) ; C10.1 v1(1235,2318) ; v1(1230.24,858.24) R8.1 ; DS4.2 v1(1287.74,1361) DS3.2 ; C2.1 v1(1294.24,1016.23) C1.1 ; v1(1313,2281.46) 1313.39,2281.07 1313.39,2265.66 1338.7,2240.35 U3.74 ; v1(1355.7,1015.23) U1.11 1399.02,1034.91 U1.9 ; v1(1373.24,1215) R10.1 ; R16.2@1378.59,1861.76 v1(1397.15,1880.32) ; v1(1415.47,858.24) R9.1 ; v1(1434,405) 1434.32,405.32 J8.1 ; R7.1 v1(1502.64,823.65) ; C13.2 1636.01,826.42 v1(1678.06,826.42) D3.A ; C14.2 1617.83,1220.79 1621.56,1224.52 v1(1621.56,1226.08) 1621.56,1265.66 R20.1 1634.59,1278.69 DS9.2 ; C7.1 1666.76,2615 v1(1694.66,2615) ; v1(1701.1,1731.62) 1701.1,1705.94 C6.1 ; U5.2 1731.06,1220.11 v1(1731.84,1220.88) ; C11.1 1800.99,1737.33 v1(1821.54,1757.88) ; v1(1832.07,1990.05) 1833.17,1988.95 1833.17,1967.31 U3.10 U3.10@1870.43,1928.78 ; C4.1 1848.92,1691.16 v1(1868.93,1711.18) ; v1(1870,405) J7.1 ; v1(1880,2003) 1911.18,1971.82 U3.13 ; C29.1 v1(1911.81,1653.69) ; v1(1992.24,1866.85) 1992.24,1865.46 2011.66,1846.04 U4.3 ; U3.20 1970.1,2108.77 1970.1,2119.9 v1(1969,2121) 1985.71,2121 U3.21 ; v1(2020.62,2194.3) 2023.54,2197.22 2023.54,2197.31 U3.27 ; v1(2046.84,1115.69) C15.1 ; v1(2046.84,1255.69) C16.1 ; v1(2102.54,1990.05) 2103.82,1990.05 C8.1 ; v1(2128,2336) 2157,2336 C9.1 ; J10.2 2605.35,392.35 v1(2606,393) ; J11.2 v1(2601.13,744.37)
  Top Layer w20: DS4.2@1258.89,1359.66 DS4.2
  other v1: 998,405
NetDS1_1: DS1.1 R1.1 | length 64
  Top Layer w10: DS1.1 1436.3,1303.67 R1.1
NetDS2_1: DS2.1 R2.1 | length 67.3
  Top Layer w10: DS2.1 1489.24,1296.76 1499.24,1306.76 R2.1
NetDS3_1: DS3.1 R3.1 | length 66.4
  Top Layer w10: DS3.1 1321,1306.76 R3.1
NetDS4_1: DS4.1 R6.1 | length 83.6
  Top Layer w10: DS4.1 1272.74,1288.5 1272.74,1277.74 1308.24,1242.24 R6.1
NetDS7_1: DS7.1 R14.1 | length 72.4
  Top Layer w10: R14.1 2055.97,2947.85 DS7.1
NetDS8_1: DS8.1 R15.1 | length 71.2
  Top Layer w10: DS8.1 2195.46,2952.03 R15.1
NetDS9_1: DS9.1 R19.1 | length 63.6
  Top Layer w10: DS9.1 1745.46,1331.92 R19.1
NetJ2_2: J2.2 R13.2 | length 95.2
  Top Layer w10: R13.2 884.58,1006 901.58,989 918,989 J2.2
NetR21_1: R21.1 R22.2
NRST: C5.2 J3.10 R17.1 SW1.2 U3.14 | length 2506.3
  Top Layer w10: SW1.2@289.32,2315.85 SW1.2@289.32,2321.85 ; SW1.2@289.32,2333.35 SW1.2@289.32,2321.85 ; SW1.2 SW1.2@289.32,2321.85 ; R17.1 R17.1@542.85,2733.6 ; v1(1170.76,2489.62) 687.41,2489.62 542.85,2634.18 C5.2 R17.1@542.85,2733.6 ; v1(1547.49,2364.34) U3.14 ; SW1.2@289.32,2321.85 264,2347.17 264,2691.24 J3.10 339,2766.24 394.23,2766.24 451.87,2708.6 517.85,2708.6 R17.1@542.85,2733.6
  Bottom Layer w10: v1(1170.76,2489.62) 1422.22,2489.62 v1(1547.49,2364.34)
"ORANGE LED 1": DS7.2 U3.42 | length 528.5
  Top Layer w10: U3.42 v1(1912.18,2503.54) ; v1(2009.62,2603) 2060.15,2653.53 DS7.2
  Bottom Layer w10: v1(1912.18,2503.54) 1912.18,2504.55 2009.62,2601.99 v1(2009.62,2603)
"ORANGE LED 2": DS8.2 U3.41 | length 569.1
  Top Layer w10: U3.41 1940.02,2503.54 1944.23,2503.54 1944.23,2505.85 v1(1943.14,2506.94) ; v1(2030,2594) 2130.2,2694.2 DS8.2
  Bottom Layer w10: v1(1943.14,2506.94) 2030,2593.8 v1(2030,2594)
"OSC IN": U3.12 U4.4 | length 97
  Top Layer w10: U3.12 1965.58,1890.58 U4.4
OVLO: R5.1 R9.2 U1.3 | length 174.5
  Top Layer w10: R5.1 R9.2 1378.8,893.24 1417.8,932.23 1417.8,955.27 U1.3
POT-L: J7.2 U3.17 | length 1858.3
  Top Layer w10: J7.2 1948.73,534.02 1988.7,574 2004.85,574 2327.89,897.04 2327.89,1667.46 U3.17
POT-M: J8.2 U3.16 | length 2261
  Top Layer w10: J8.2 1513.06,534.02 1568.03,589 1998.64,589 2312.89,903.25 2312.89,1654.62 U3.16
POT-R: J9.2 U3.15 | length 2685
  Top Layer w10: J9.2 1077.39,570.39 1111,604 1992.43,604 2297.89,909.47 2297.89,1641.78 U3.15
"PWR CB 3V3": C12.1 U5.1 | length 77.7
  Top Layer w10: U5.1 1802.54,1171.21 1829.83,1143.92 C12.1
"PWR FB 3V3": R18.1 R20.2 U5.3 | length 167.5
  Top Layer w10: U5.3 1693.66,1266.56 R20.2 1690.3,1271.92 R18.1
"PWR SW 3V3": C12.2 D3.K L1.1 U5.6 | length 354.6
  Top Layer w20: C12.2 1769.28,1081.45 U5.6 1766.42,1078.59 1766.42,1032.24 1733.83,999.65 D3.K 1827.39,983.9 1852.83,958.47 L1.1
RST: U3.67 | length 665.1
  Top Layer w10: 1287.96,2940.24 1288.87,2939.33 1288.87,2921.69 1334.66,2875.9 v1(1334.66,2817.89) ; v1(1335,2658) 1335,2437.64 U3.67
  Bottom Layer w10: v1(1334.66,2817.89) 1334.66,2658.34 v1(1335,2658)
SD_CMD: R27.1 SD1.3 U3.83 | length 999.3
  Top Layer w10: SD1.3 v1(1069,1881.43) ; v1(1278.26,1900.25) 1279.36,1901.35 1282.15,1901.35 U3.83
  Bottom Layer w10: v1(1069,1881.43) 1259.45,1881.43 v1(1278.26,1900.25)
SD_D0: R26.1 SD1.7 U3.65 | length 1224
  Top Layer w10: SD1.7 553.69,2054.66 582,2082.97 1115.97,2082.97 v1(1199,2166) ; v1(1440.2,2180.55) 1441.3,2181.65 1445.77,2181.65 1493.65,2229.53 1493.65,2334.67 U3.65
  Bottom Layer w10: v1(1199,2166) 1424.1,2166 1438.65,2180.55 v1(1440.2,2180.55)
SD_D1: R25.1 SD1.8 U3.66 | length 1168.9
  Top Layer w10: SD1.8 1105.69,2097.97 1193.37,2185.65 1197.9,2185.65 v1(1199,2186.75) ; v1(1438.71,2202.78) 1478.65,2242.72 1478.65,2321.83 U3.66
  Bottom Layer w10: v1(1199,2186.75) 1421.12,2186.75 1437.16,2202.78 v1(1438.71,2202.78)
SD_D2: R29.1 SD1.1 U3.78 | length 1006.5
  Top Layer w10: SD1.1 1056.5,1794.82 1161.93,1900.25 1249.25,1987.57 v1(1249.85,1987.57) ; v1(1275,2032) 1275,2032.69 1352.62,2110.32 U3.78
  Bottom Layer w10: v1(1249.85,1987.57) 1249.85,1988.17 1273.9,2012.22 1273.9,2030.9 v1(1275,2032)
SD_D3: R28.1 SD1.2 U3.79 | length 984.6
  Top Layer w10: SD1.2 1075.13,1838.13 1249,2012 1281.45,2012 U3.79
SDIO_CK: SD1.5 U3.80 | length 984.4
  Top Layer w10: SD1.5@499.98,1978.8 SD1.5 803.63,1968.05 877,2041.41 1214.8,2041.41 1251.38,2078 v1(1275,2078) ; v1(1338.7,2041.41) U3.80
  Bottom Layer w10: v1(1275,2078) 1311.59,2041.41 v1(1338.7,2041.41)
SETI: R10.2 U1.8 | length 124.3
  Top Layer w10: R10.2 1373.24,1147 1418.7,1101.53 U1.8
"SPI CLK": U3.30 | length 1341.5
  Top Layer w10: 1150.17,2940.24 1151.07,2939.33 1151.07,2898.93 1367.8,2682.2 1798.01,2682.2 1834.29,2682.2 2080.3,2436.19 2080.3,2399.92 2080.3,2337.59 U3.30
"SPI MOSI": U3.32
SWCLK: J3.4 U3.76 | length 1280.1
  Top Layer w10: J3.4 309,2578.66 279,2548.66 279,2523.81 311.57,2491.24 614.03,2491.24 866.19,2239.07 1194.88,2239.07 1275.95,2158 1305.63,2158 U3.76
SWDIO: J3.2 U3.72 | length 1169.1
  Top Layer w10: J3.2 339,2506.24 627.34,2506.24 709.19,2424.39 1209.06,2424.39 U3.72
USART3_RX: P1.2 U3.48 | length 696.8
  Top Layer w10: U3.48 1772.99,2532.32 1817.86,2577.19 v1(1817.86,2578.14)
  Bottom Layer w10: v1(1817.86,2578.14) 1818.14,2578.14 1972.57,2732.57 P1.2
USART3_TX: P1.1 U3.47 | length 646.2
  Top Layer w10: U3.47 U3.47 1832.07,2562.69 v1(1832.07,2562.75)
  Bottom Layer w10: v1(1832.07,2562.75) 1901.89,2632.57 P1.1
"USB DM": R24.2
"USB DP": R23.2
"USB M": J4.3 R24.1
"USB P": J4.2 R23.1
UVLO: R4.1 R8.2 U1.2 | length 190
  Top Layer w10: R4.1 R8.2 1321.62,863.24 1398.11,939.73 1398.11,955.27 U1.2
UVOV: DS1.2 U1.7 | length 110.6
  Top Layer w10: DS1.2 1438.39,1181.91 U1.7
VUSB: J4.1 R21.2
pads on no net: FID1.1 FID2.1 FID3.1 FID4.1 J3.6 J3.7 J3.8 J4.M J6.5 J6.6 J7.4 J7.5 J8.4 J8.5 J9.4 J9.5 J10.MP1 J10.MP2 J11.MP1 J11.MP2 J12.MP1 J12.MP2 J13.MP1 J13.MP2 M1.1 M2.1 M3.1 M4.1 P?.1 P?.2 P?.3 P?.4 P?.5 P?.6 P?.7 P?.8 P?.9 P?.10 P?.11 P?.12 P?.13 P?.14 P?.15 P?.16 P?.17 P?.18 P?.19 P?.20 P?.21 P?.22 P?.23 P?.24 P?.25 P?.26 P?.27 P?.28 P?.29 P?.30 P?.31 P?.32 P?.33 P?.34 P?.35 P?.36 P?.37 P?.38 P?.39 P?.40 U1.5 U2.5 U2.8 U3.1 U3.2 U3.3 U3.4 U3.5 U3.7 U3.8 U3.9 U3.18 U3.25 U3.33 U3.34 U3.35 U3.36 U3.37 U3.38 U3.39 U3.40 U3.43 U3.44 U3.45 U3.46 U3.49 U3.51 U3.53 U3.54 U3.55 U3.56 U3.57 U3.58 U3.59 U3.60 U3.61 U3.62 U3.63 U3.64 U3.68 U3.69 U3.70 U3.71 U3.73 U3.77 U3.81 U3.82 U3.86 U3.87 U3.88 U3.89 U3.90 U3.92 U3.93 U3.95 U3.96 U3.97 U3.98 U3.99 U4.2 U4.5
copper on no net: | length 5995.7
  Top Layer w10: 757,2614.76 824.76,2614.76 832,2622 842,2622 895.46,2675.46 895.46,2677.33 910.46,2692.33 920.46,2692.33 ; 787.01,2817.89 813.54,2817.89 v1(814.33,2818.68) ; 787.76,2878 788.76,2877 v1(811.5,2877) ; 832,2752 832,2795.41 849.48,2812.89 849.48,2817.89 849.48,2822.89 859.48,2832.89 864.48,2832.89 952.41,2920.82 952.41,2939.33 953.32,2940.24 ; 850.24,2878 853.22,2880.98 884.52,2880.98 932.73,2929.19 932.73,2939.33 933.63,2940.24 ; 908.44,2756.8 v1(908.44,2781.42) ; 908.44,2819.27 913.44,2819.27 973,2878.84 973,2940.24 ; 920.46,2562.33 v1(920.46,2599.33) ; 969,2756.76 v1(969,2781.42) ; 992.69,2940.24 992.69,2877.31 969,2853.62 969,2819.24 974,2819.24 999,2794.24 999,2738.58 1010.38,2727.2 1010.38,2673.51 ; 1012.37,2940.24 1012.37,2875.01 1029.56,2857.82 1029.56,2819.63 ; 1029.56,2756.58 1029.56,2757.16 v1(1029.56,2783.27) ; 1051.74,2940.24 1052.65,2939.33 1052.65,2911.63 1144.64,2819.63 1149.64,2819.63 ; 1071.43,2940.24 1072,2940.81 v1(1072,2968) ; 1089.53,2757.16 v1(1089.53,2783.27) ; 1149.64,2757.16 v1(1149.64,2781.76) ; 1209.22,2940.24 1210.13,2939.33 1210.13,2906.7 1389.63,2727.2 1852.93,2727.2 2223,2357.13 2223,2268 2087.17,2132.17 2085.89,2132.17 2079.22,2138.85 ; 1228.91,2940.24 1228.91,2914.09 1249.55,2893.45 v1(1249.55,2892.55) ; 1248.59,2940.24 1249.5,2939.33 1249.5,2917.89 1275.6,2891.79 v1(1275.6,2866.51) ; v1(1249.55,2737) 1249.55,2439.57 1394.38,2294.75 ; 1268.28,2940.24 1269.18,2939.33 1269.18,2919.41 1307,2881.6 v1(1307,2844) ; v1(1276,2710) 1276,2440.97 1408.3,2308.67 ; v1(1307.65,2692.33) 1307.65,2437.16 1422.22,2322.59 ; 1307.65,2940.24 1308.55,2939.33 1308.55,2923.22 1334.54,2897.24 1357.65,2874.12 1370.46,2874.12 1380.46,2864.12 ; 1347.02,2940.24 1347.92,2939.33 1347.92,2921.69 1377.06,2892.55 1401.17,2892.55 1410.5,2883.23 1438.71,2883.23 1446.41,2875.54 1446.41,2827.4 ; 1366.7,2940.24 1367.61,2939.33 1367.61,2923.22 1376.34,2914.49 1462.94,2914.49 1472,2905.42 1472,2855.55 1497.59,2829.96 1497.59,2827.4 1531.18,2827.4 1558.75,2854.97 1558.75,2859.97 ; 1380.46,2801.65 v1(1380.46,2829.63) ; 1472,2752.6 1535.63,2752.6 1563.64,2780.61 1563.64,2784.58 ; 1501.19,2883.23 1501.19,2888.23 1511.19,2898.23 1530.46,2898.23 v1(1531.18,2898.95) ; v1(1589.25,2859.97) 1621.22,2859.97
  Bottom Layer w10: v1(1249.55,2737) v1(1249.55,2892.55) ; v1(1275.6,2866.51) 1275.87,2866.24 1275.87,2710.13 v1(1276,2710) ; v1(1307,2844) 1307,2692.98 v1(1307.65,2692.33)

## Polygon pours and split planes (outlines as drawn)
GND on Bottom Layer "GND_L02_P001" (solid, remove dead copper, pour order 1): 231,3228.01 2804.05,3228.01 2804.05,201.01 231,201.01

## Silkscreen, mask and mechanical layers (free items; w line width, h text height)
Top Overlay:
  text "PROG" at 235,2904.24 h60
  text "26" at 901,2880 h30
  text "UART" at 2455,2841 h60 r270
Bottom Overlay:
  text "QUTMS Steering Wheel Board V01 / Designed by Jarrod Fisher" at 2485.27,2082 h60
Mechanical 1:
  lines w10: 210,3246 210,3248 ; 212,173 210,173 ; 212,3248 210,3248 ; 210,173 210,3248 ; 210,173 2825,173 2825,3248 210,3248

## Text inside footprints (layer, text, board x,y; h text height)
J4: Top Overlay "4" at 4874.5,1191.75 h40 r90; Top Overlay "1" at 4874.1,839.61 h40 r90; Top Overlay "PH x4 COMB" at 4517,1172.67 h29.53 r270; Top Overlay "4" at 4671,1185 h40 r90; Top Overlay "1" at 4666,850 h40 r90
P?: Top Overlay "40" at 3168.94,2920.99 h40 r90; Top Overlay "39" at 3322.49,2920.99 h40 r90; Top Overlay "1" at 3322.49,1883.2 h40 r90; Top Overlay "2" at 3168.94,1869.87 h40 r90